# Altium PCB LayoutDesign.PcbDoc
Units mm, origin at the board's own origin, x right, y up, seen from the top; angles counter-clockwise.
Board outline 67.75 x 40.3 mm, 2 copper layers (Top Layer, Bottom Layer), stack 1.569 mm thick; 9 components, 16 nets, 95 pads, 20 vias.
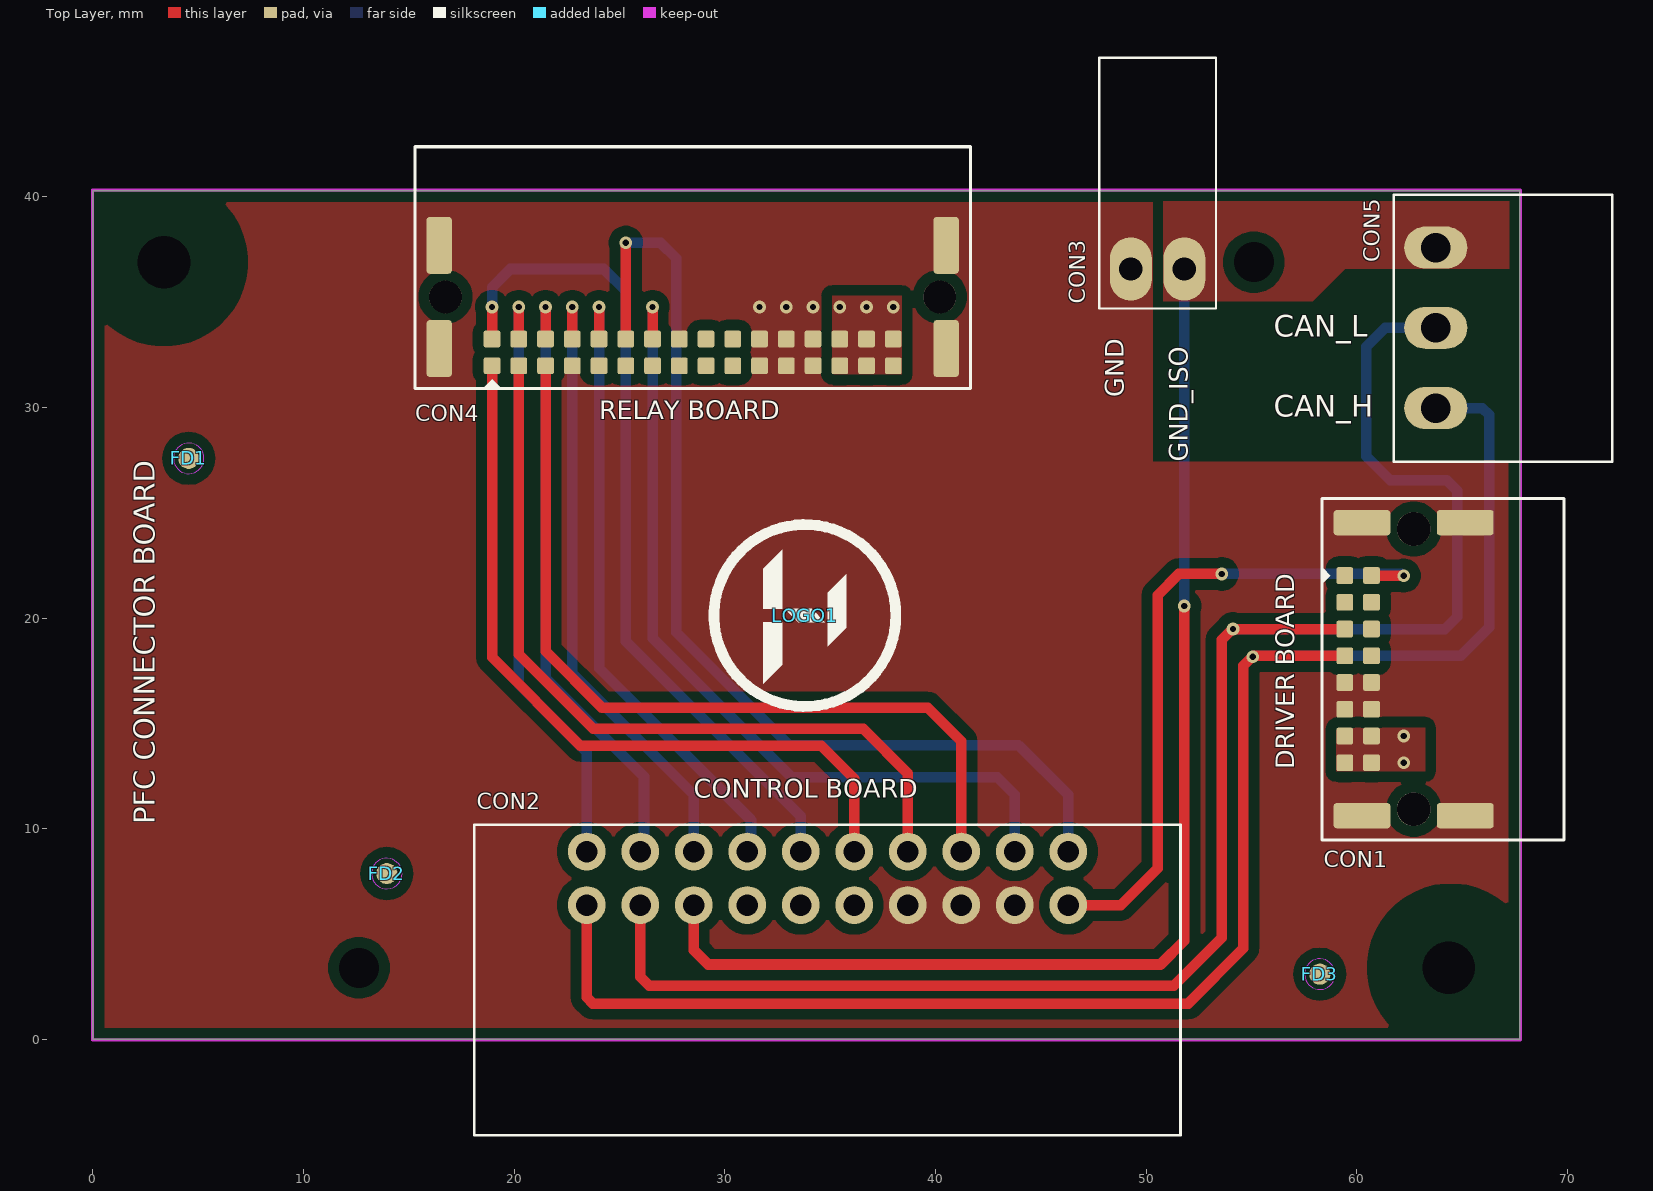
[diagram p0: Top Layer view]
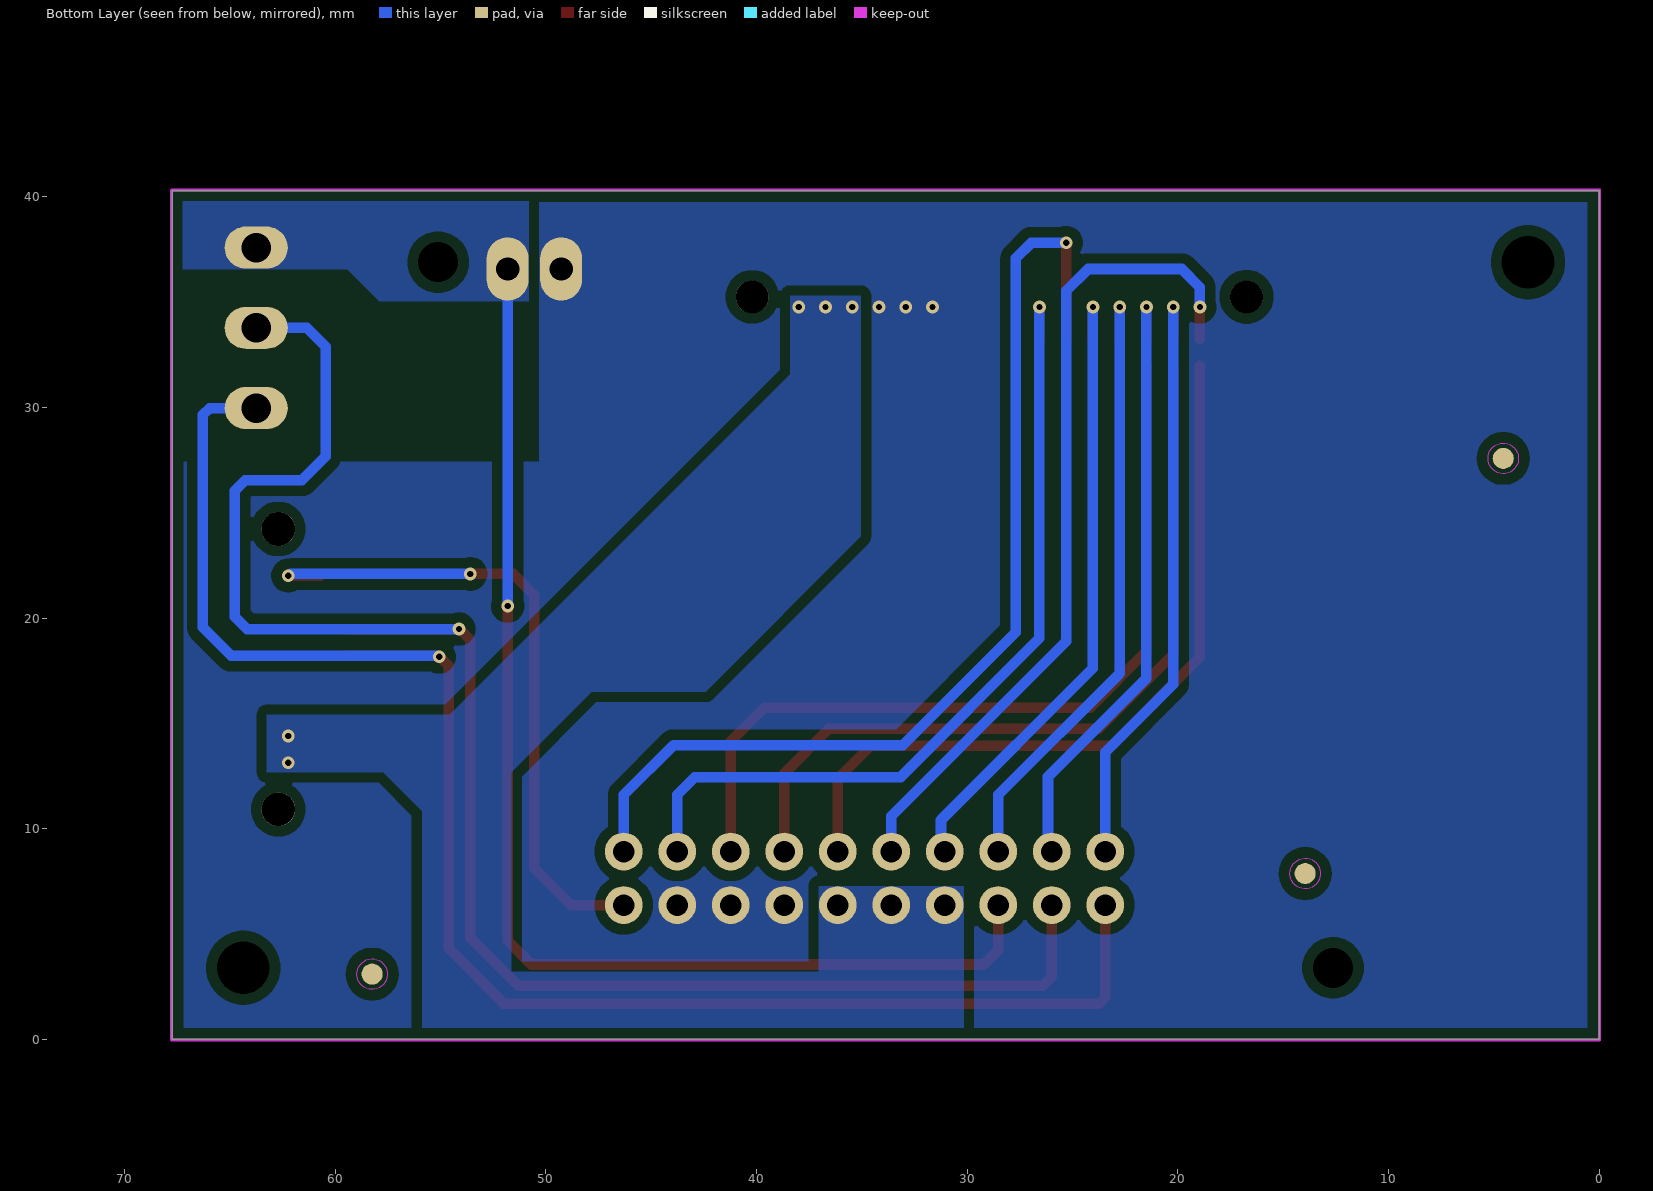
[diagram p1: Bottom Layer view, seen from below]
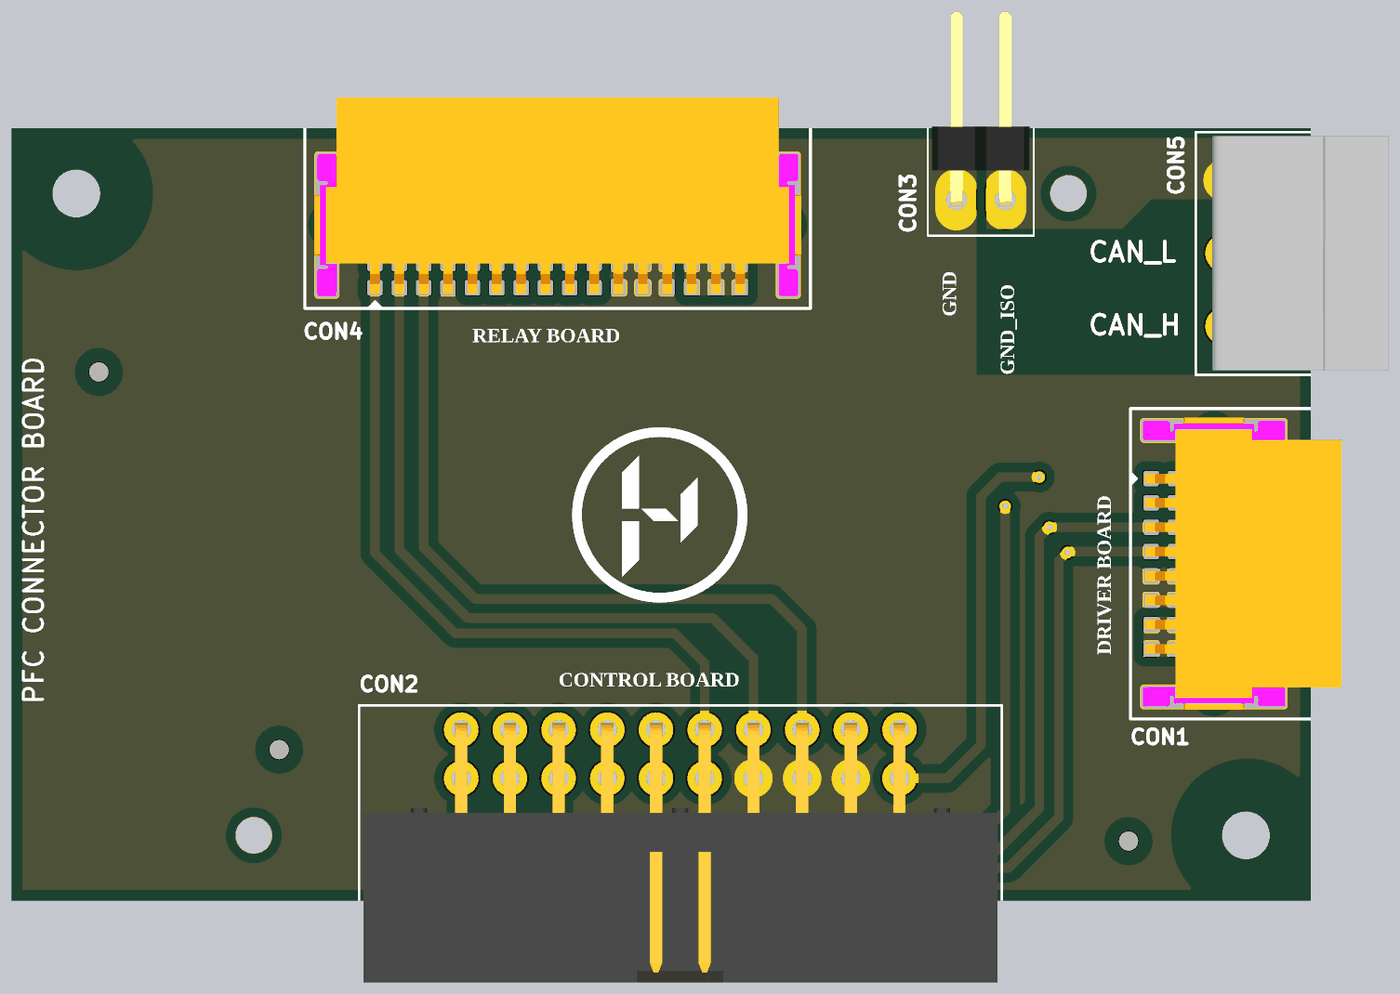
[diagram p2: 3D render of the assembled board from above, using the file's embedded part models]

## Layer stack, top to bottom
Top Solder: solder mask 0.0254, SM-001, Dk 4
Top Layer: signal copper 0.035
Dielectric 1: core 1.4986, Core-043, Dk 4.3
Bottom Layer: signal copper 0.035
Bottom Solder: solder mask 0.0254, SM-001, Dk 4

## Board outline
0,0 0,32.4 0,40.3 9.542,40.3 67.75,40.3 67.75,7.9 67.75,0 61.542,0

## Design rules (kind name [scope] priority, off if disabled: settings)
BoardOutlineClearance [All] p1: gap=0.5 ignorepadtopadclearanceinfootprint=FALSE
Clearance GND [InNet('GND') vs InNet('GND_ISO')] p1: gap=0.5 ignorepadtopadclearanceinfootprint=FALSE
Clearance 12V [InNet('+12V')] p2: gap=0.5 ignorepadtopadclearanceinfootprint=FALSE
Clearance [All] p3: gap=0.5 ignorepadtopadclearanceinfootprint=FALSE
PlaneClearance [All] p1: clearance=0.254
PolygonConnect [All] p1: connectstyle=Direct reliefconductorwidth=0.254 reliefentries=4 polygonreliefangle="90 Angle" airgapwidth=0.254
RoutingVias [All] p1: holewidth=0.711 width=1.27 viastyle="Through Hole" minholewidth=0.711 minwidth=1.27 maxholewidth=0.711 maxwidth=1.27
SolderMaskExpansion [All] p1: expansion=0.102 istentingtop=FALSE
Width [All] p1: maxlimit=1 minlimit=0.2 preferedwidth=0.254
29 further rules are at their usual default settings.

## Components (designator, comment, footprint, x,y, rotation, side; value= is the part's Value field where it differs from the comment)
CON1 "CON_16P_2R_A8-B8_2SH" CON_15150162601000_HARTING 62.293,17.577 r90 top locked
CON2 "CON_20POS_2R" male-thd-box-header-2x10-2.54mm-90D_AMTEK 34.874,7.645 r0 top
CON3 "CON_2POS_1R" male-thd-1x2-pin-header-2.54mm-90D 50.546,36.576 r180 top
CON4 "CON_32P_2R_A16-B16_2SH" CON_15150322601000_HARTING 28.473,34.84 r180 top
CON5 "CON_3POS_1R" CON_15EDGRC-3.81-03P-14-00AH 63.754,33.782 r90 top
FD1 "FIDUCIAL" FIDUCIAL_1mm 4.547,27.584 r0 top
FD2 "FIDUCIAL" FIDUCIAL_1mm 13.953,7.874 r0 top
FD3 "FIDUCIAL" FIDUCIAL_1mm 58.25,3.099 r0 top
LOGO1 "HCD_LOGO" HCD_LOGO_V1 33.802,20.125 r0 top locked

## Footprints (in the part's own frame and the unit in brackets; to place one, negate y for a bottom-side part, rotate by r counter-clockwise, add the part's x,y. Pads: shape width x height; smd on the part's side, far side on the other; paste and mask are expansions set on the pad)
CON_15EDGRC-3.81-03P-14-00AH [mm]
  oval 2x3 hole 1.4: 1(-3.81,0) 2(0,0) 3(3.81,0)
  silkscreen extent -6.35,-8.38 6.32,2, body extent -6.11,-8.06 6.11,1.14, height 7.29
CON_15150162601000_HARTING [mm]
  rrect25% 0.8x0.8 smd mask+0.05: A1(4.445,1.59) A2(3.175,1.59) A3(1.905,1.59) A4(0.635,1.59) A5(-0.635,1.59) A6(-1.905,1.59) A7(-3.175,1.59) A8(-4.445,1.59) B1(4.445,2.86) B2(3.175,2.86) B3(1.905,2.86) B4(0.635,2.86) B5(-0.635,2.86) B6(-1.905,2.86) B7(-3.175,2.86) B8(-4.445,2.86)
  rrect25% 1.2x2.7 smd mask+0.05: SH1(6.955,-2.86) SH1(6.955,2.04) SH2(-6.955,-2.86) SH2(-6.955,2.04)
  round 1.6 hole 1.6 unplated mask+0: ""(-6.655,-0.41) ""(6.655,-0.41)
  silkscreen extent -8.1,-7.54 8.1,3.94, body extent -7.62,-7.06 7.62,3.29, height 4.26
CON_15150322601000_HARTING [mm]
  rrect25% 0.8x0.8 smd mask+0.05: A1(9.525,1.59) A2(8.255,1.59) A3(6.985,1.59) A4(5.715,1.59) A5(4.445,1.59) A6(3.175,1.59) A7(1.905,1.59) A8(0.635,1.59) A9(-0.635,1.59) A10(-1.905,1.59) A11(-3.175,1.59) A12(-4.445,1.59) A13(-5.715,1.59) A14(-6.985,1.59) A15(-8.255,1.59) A16(-9.525,1.59) B1(9.525,2.86) B2(8.255,2.86) B3(6.985,2.86) B4(5.715,2.86) B5(4.445,2.86) B6(3.175,2.86) B7(1.905,2.86) B8(0.635,2.86) B9(-0.635,2.86) B10(-1.905,2.86) B11(-3.175,2.86) B12(-4.445,2.86) B13(-5.715,2.86) B14(-6.985,2.86) B15(-8.255,2.86) B16(-9.525,2.86)
  rrect25% 1.2x2.7 smd mask+0.05: SH1(12.035,-2.86) SH1(12.035,2.04) SH2(-12.035,-2.86) SH2(-12.035,2.04)
  round 1.55 hole 1.55 unplated mask+0: ""(-11.735,-0.41) ""(11.735,-0.41)
  silkscreen extent -13.18,-7.54 13.18,3.94, body extent -12.7,-7.06 12.7,3.29, height 4.27
FIDUCIAL_1mm [mm]
  round 1 smd mask+0.05: ""(0,0)
  round 1 smd far side mask+0.05: ""(0,0)
  Top Layer keep-out circle w0.05: c0,0 r0.725
  Bottom Layer keep-out circle w0.05: c0,0 r0.725
HCD_LOGO_V1 [mm]
  silkscreen extent -4.31,-4.32 4.32,4.32
male-thd-1x2-pin-header-2.54mm-90D [mm]
  oval 2x3 hole 1.1: 1(-1.27,0) 2(1.27,0)
  silkscreen extent -2.77,-10.03 2.77,1.88, body extent -2.54,-9.81 2.54,0.32, height 2.51
male-thd-box-header-2x10-2.54mm-90D_AMTEK [mm]
  round 1.8 hole 1.02: 1(-11.43,1.27) 2(-8.89,1.27) 3(-6.35,1.27) 4(-3.81,1.27) 5(-1.27,1.27) 6(1.27,1.27) 7(3.81,1.27) 8(6.35,1.27) 9(8.89,1.27) 10(11.43,1.27) 11(-11.43,-1.27) 12(-8.89,-1.27) 13(-6.35,-1.27) 14(-3.81,-1.27) 15(-1.27,-1.27) 16(1.27,-1.27) 17(3.81,-1.27) 18(6.35,-1.27) 19(8.89,-1.27) 20(11.43,-1.27)
  silkscreen extent -16.76,-12.19 16.76,2.54, body extent -16.53,-11.92 16.53,1.63, height 8.86

## Part data
CON1: library part CONN_MALE_BXHDR_16POS_2R_1.27MM_SMD_90D_15150162601000, "Connector Header Surface Mount, Right Angle 16 position 0.050\" (1.27mm)", Current=N/A, Manufacturer=HARTING, Manufacturer PN=15150162601000, Max Reflow Temp=260C, Temp# Operating="-55°C ~ 125°C", Component Type=Connector, Distributor=Digikey, Features="Contact Finish-Mating - Gold_Contact Finish-Post - Tin_Contact Material - Copper Alloy_Material Flammability Rating - UL94 V-0", Height=4.25, Lead Status="ROHS3 Compliant", Max Reflow Duration=10s, Mounting Type=SMD, MSL=1, Supplier URL=https://www.digikey.com/en/products/detail/harting/15150162601000/3854911?s=N4IgTCBcDaIIwFZEAY4DYxtcnIC6AvkA, Voltage=N/A, Identifier=CONN_MALE_BXHDR_16POS_2R_1.27MM_SMD_90D_15150162601000
CON2: library part CONN_MALE_BXHDR_20POS_2R_2.54MM_THD_90D_5BH1RDA88-20G05AU-00, "BOX HEADER 20PIN(2x10) 2.54mm THT R/A MALE BLACK", Current=3A, Manufacturer=AMTEK, Manufacturer PN=5BH1RDA88-20G05AU-00, Max Reflow Temp=260C, Temp# Operating="-45°C ~ 105°C", Voltage="1000V AC", Component Type="Box Header", Distributor=Özdisan, Features="Flat kablo konnektörü", Height=10.32mm, Lead Status="ROHS3 Compliant", Max Reflow Duration=10s, Mounting Type=THD, MSL=1, Supplier URL=https://www.ozdisan.com/konnektor-ve-baglanti-elemanlari/header-konnektorler/box-headerlar/5BH1RDA88-20G05AU-00/485576, Identifier=CONN_MALE_BXHDR_20POS_2R_2.54MM_THD_90D_5BH1RDA88-20G05AU-00
CON3: library part PINHDR_MALE_HEADER_2POS_1R_2.54mm_THD_90D, "PIN HEADER 2PIN(1x2) 2.54mm THT R/A 6X3X4.5MM", Manufacturer=AMTEK, Manufacturer PN=5PH1RUA25-102G0NNBL6X3X4, Max Reflow Temp=260C, Temp# Operating="-40°C ~ 105°C", Tolerance=N/A, Voltage="500V AC", Component Type="Pin Header", Distributor=Özdisan, Features="Pin Header", Lead Status="ROHS3 Compliant", Max Reflow Duration=10s, Mounting Type=THD, MSL=1, Supplier URL=https://ozdisan.com/konnektor-ve-baglanti-elemanlari/header-konnektorler/pin-headerlar/5PH1RUA25-102G0NNBL6X3X4/959033, Identifier=PINHDR_MALE_HEADER_2POS_1R_2.54mm_THD_90D
CON4: library part CONN_MALE_BXHDR_32POS_2R_1.27MM_SMD_90D_15150322601000, "Connector Header Surface Mount, Right Angle 32 position 0.050\" (1.27mm)", Current=N/A, Manufacturer=HARTING, Manufacturer PN=15150322601000, Max Reflow Temp=260C, Temp# Operating="-55°C ~ 125°C", Component Type=Connector, Distributor=Digikey, Features="Contact Finish-Mating - Gold_Contact Finish-Post - Tin_Contact Material - Copper Alloy_Material Flammability Rating - UL94 V-0", Height=4.25, Lead Status="ROHS3 Compliant", Max Reflow Duration=10s, Mounting Type=SMD, MSL=1, Supplier URL=https://www.digikey.com/en/products/detail/harting/15150322601000/3854914?s=N4IgTCBcDaIIwFZEAYDMYwDZl2XkAugL5A, Voltage=N/A, Identifier=CONN_MALE_BXHDR_32POS_2R_1.27MM_SMD_90D_15150322601000
CON5: library part KLEMENS_PLG-IN_MALE_3POS_1R_3.81mm_THD_90D_15EDGRC-3.81-03P-14-00AH, "TERM.BLK.3.81MM 3P 90C MALE GREEN CLOSED", Current=8A, Manufacturer=DEGSON, Manufacturer PN=15EDGRC-3.81-03P-14-00AH, Max Reflow Temp=260C, Temp# Operating="-40°C ~ 105°C", Temp# Storage=N/A, Voltage=300V, Component Type=Klemens, Distributor=Özdisan, Features="Geçmeli klemens", Height=9.2mm, Lead Status="ROHS3 Compliant", Max Reflow Duration=10s, Mounting Type=THD, MSL=1, Supplier URL=https://ozdisan.com/konnektor-ve-baglanti-elemanlari/klemensler/gecmeli-klemensler/15EDGRC-3-81-03P-14-00AH/701115, Identifier=KLEMENS_PLG-IN_MALE_3POS_1R_3.81mm_THD_90D_15EDGRC-3.81-03P-14-00AH
FD1 FD2 FD3: library part 1MM_FIDUCIAL, "Fiducial 1mm", Current=N/A, Package=FIDUCIAL_1mm, Component Type=Fiducial, ComponentLinkURL=N/A, Cost=N/A, Distributor=N/A, Features=N/A, Height=N/A, Lead Status=N/A, Manufacturer=N/A, Manufacturer PN=N/A, Max Reflow Duration=N/A, Max Reflow Temp=N/A, Mounting Type=SMD, MSL=N/A, Part Status=N/A, Temp# Operating=N/A, Temp# Storage1=N/A, Voltage=N/A, Identifier=1MM_FIDUCIAL
LOGO1: library part HCD_LOGO_V1, "Hamit Can Dinç LOGO", Component Type=LOGO, Identifier=HCD_LOGO_V1

## Free pads (board coordinates)
  rect 0x0 hole 1.9: 18(12.63,3.4) 18(55.12,36.9)
  round 0.2 hole 2.5 unplated: ""(3.37,36.9) ""(64.37,3.4)

## Via types
v1: diameter 0.6, hole 0.3, Top Layer to Bottom Layer, 20 vias

## Nets (pads, with @x,y where several pads share a name; then routed paths per layer and width w, separated by ;. In a path a pad name is that pad's centre, name@x,y a point inside that pad or via, vN(x,y) a via of type N, cw(c..) or ccw(c..) an arc to the next point about the centre after c; other vN are vias at no path point)
+12V: CON1.A7 CON1.A8 CON1.B7 CON1.B8 CON2.14 CON2.15 CON2.16 CON4.A14 CON4.A15 CON4.A16 CON4.B14 CON4.B15 CON4.B16
  other v1: 62.227,13.132 62.227,14.402 35.458,34.774 36.728,34.774 37.998,34.774
CAN_H: CON1.B4 CON2.11 CON5.1 | length 79.7
  Top Layer w0.5: CON2.11 23.444,1.995 23.737,1.702 51.994,1.702 54.61,4.318 54.61,17.731 55.04,18.161 v1(55.067,18.161) 55.094,18.161 55.145,18.212 CON1.B4
  Bottom Layer w0.5: v1@55.145,18.212 64.948,18.212 66.294,19.558 66.294,29.647 65.969,29.972 CON5.1
CAN_L: CON1.B3 CON2.12 CON5.2 | length 83.1
  Top Layer w0.5: CON2.12 25.984,2.972 26.416,2.54 51.308,2.54 53.594,4.826 53.594,18.975 54.1,19.482 v1(54.127,19.482) CON1.B3
  Bottom Layer w0.5: v1@54.114,19.482 v1(54.127,19.482) 64.186,19.482 64.77,20.066 64.77,26.053 64.276,26.547 61.591,26.547 60.452,27.686 60.452,32.884 61.35,33.782 CON5.2
FLY_EN: CON1.A1 CON2.20 | length 31.6
  Top Layer w0.254: CON1.A1 CON1.A1@60.709,22.015 ; v1@62.214,22.015 v1@62.221,22.009
  Top Layer w0.5: CON2.20 48.793,6.375 50.546,8.128 50.546,21.082 51.562,22.098 v1(53.594,22.098) ; CON1.A1@60.709,22.015 v1@62.214,22.015
  Bottom Layer w0.5: v1(53.594,22.098) 62.124,22.098 62.203,22.019 v1(62.23,22.019)
GND: CON1.A5 CON1.A6 CON1.B5 CON1.B6 CON1.SH1 CON1.SH2 CON2.17 CON2.18 CON2.19 CON3.2 CON4.A8 CON4.A11 CON4.A12 CON4.A13 CON4.B4 CON4.B11 CON4.B12 CON4.B13 CON4.SH1 CON4.SH2
  other v1: 31.648,34.774 32.918,34.774 34.188,34.774
GND_ISO: CON2.13 CON3.1 CON5.3 | length 58.1
  Top Layer w0.5: CON2.13 28.524,4.242 29.21,3.556 50.685,3.556 51.816,4.687 v1(51.816,20.574)
  Bottom Layer w0.5: v1(51.816,20.574) CON3.1
INRS1: CON2.10 CON4.A6 | length 49.5
  Top Layer w0.5: CON4.A6 v1(25.298,37.822)
  Bottom Layer w0.5: v1(25.298,37.822) 26.948,37.822 27.686,37.084 27.686,19.338 33.054,13.97 43.942,13.97 46.304,11.608 CON2.10
INRS2: CON2.9 CON4.A7 | length 40.2
  Top Layer w0.5: CON4.A7 v1(26.568,34.774)
  Bottom Layer w0.5: v1(26.568,34.774) 26.568,19.042 33.164,12.446 42.926,12.446 43.764,11.608 CON2.9
PHS_N_OFF: CON2.4 CON4.A5 | length 30.4
  Top Layer w0.5: CON4.A5 v1(24.028,34.774)
  Bottom Layer w0.5: v1(24.028,34.774) 24.028,17.628 31.242,10.414 31.242,9.093 CON2.4
PHS_N_ON: CON2.3 CON4.A4 | length 29.8
  Top Layer w0.5: CON4.A4 v1(22.758,34.774)
  Bottom Layer w0.5: v1(22.758,34.774) 22.758,17.374 28.524,11.608 CON2.3
PHS_R_OFF: CON2.7 CON4.B2 | length 38.2
  Top Layer w0.5: CON4.B2 20.218,18.28 23.753,14.745 36.563,14.745 38.684,12.624 CON2.7
PHS_R_ON: CON2.8 CON4.B3 | length 40.3
  Top Layer w0.5: CON4.B3 21.488,18.424 24.169,15.744 39.628,15.744 41.224,14.148 CON2.8
PHS_S_OFF: CON2.5 CON4.A1 | length 39.7
  Top Layer w0.5: CON4.A1 v1(18.948,34.774)
  Bottom Layer w0.5: v1(18.948,34.774) 18.948,35.712 19.812,36.576 24.258,36.576 25.298,35.536 25.298,18.898 33.604,10.592 CON2.5
PHS_S_ON: CON2.6 CON4.B1 | length 36.9
  Top Layer w0.5: CON4.B1 18.948,18.136 23.139,13.945 34.569,13.945 36.144,12.37 CON2.6
PHS_T_OFF: CON2.2 CON4.A3 | length 29.4
  Top Layer w0.5: CON4.A3 v1(21.488,34.774)
  Bottom Layer w0.5: v1(21.488,34.774) 21.488,17.133 26.162,12.46 26.162,9.093 CON2.2
PHS_T_ON: CON2.1 CON4.A2 | length 28.7
  Top Layer w0.5: CON4.A2 v1(20.218,34.774)
  Bottom Layer w0.5: v1(20.218,34.774) 20.218,16.866 23.444,13.64 CON2.1
pads on no net: CON1. CON1.A2 CON1.A3 CON1.A4 CON1.B1 CON1.B2 CON4. CON4.A9 CON4.A10 CON4.B5 CON4.B6 CON4.B7 CON4.B8 CON4.B9 CON4.B10 FD1. FD2. FD3.

## Polygon pours and split planes (outlines as drawn)
GND on Top Layer "GND_L01_P009" (solid, remove dead copper, pour order 9): 67.75,27.432 50.317,27.432 50.317,40.3 0,40.3 0,0 67.75,0
GND_ISO on Top Layer "GND_ISO_L01_P000" (solid, pour order 0): 67.75,36.592 59.452,36.592 57.912,35.052 50.827,35.052 50.827,40.3 67.75,40.3
+12V on Top Layer "NONET_L-01_P-001" (solid, pour order 7): 63.246,12.732 59.033,12.732 59.033,14.802 63.246,14.802
+12V on Top Layer "NONET_L-01_P-001" (solid, pour order 4): 35.058,33.25 35.052,33.256 35.052,35.306 38.398,35.306 38.398,31.58 35.058,31.58
GND on Top Layer "NONET_L-01_P-001" (solid, pour order 1): 31.248,33.25 31.242,33.256 31.242,35.306 34.588,35.306 34.588,31.58 31.248,31.58
GND on Bottom Layer "GND_L02_P008" (solid, remove dead copper, pour order 8): 67.75,27.432 50.317,27.432 50.317,40.3 0,40.3 0,0 67.75,0
GND_ISO on Bottom Layer "GND_ISO_L02_P006" (solid, pour order 6): 67.75,36.576 59.436,36.576 57.912,35.052 50.827,35.052 50.827,40.3 67.75,40.3
+12V on Bottom Layer "NONET_L-01_P-001" (solid, pour order 5): 35.052,35.306 38.398,35.306 38.398,31.58 54.928,15.05 52.101,12.223 47.814,16.51 42.418,16.51 35.052,23.876
+12V on Bottom Layer "NONET_L-01_P-001" (solid, pour order 3): 63.246,15.403 63.246,12.686 57.734,12.686 55.88,10.831 55.88,0.417 30.164,0.417 30.164,7.275 37.044,7.275 37.044,3.211 51.638,3.211 51.638,12.686 54.356,15.403

## Keep-outs
Keep-Out Layer:
  lines w0.1: -0.05,0 ccw(c0,0) 0,-0.05 ; -0.05,0 ccw(c0,0) 0,-0.05 ; -0.05,0 -0.05,32.4 -0.05,40.3 ; -0.05,40.3 cw(c0,40.3) 0,40.35 ; -0.05,40.3 cw(c0,40.3) 0,40.35 ; 0,-0.05 61.542,-0.05 67.75,-0.05 ; 0,40.35 9.542,40.35 67.75,40.35 ; 67.75,-0.05 ccw(c67.75,0) 67.8,0 ; 67.75,-0.05 ccw(c67.75,0) 67.8,0 ; 67.75,40.35 cw(c67.75,40.3) 67.8,40.3 ; 67.75,40.35 cw(c67.75,40.3) 67.8,40.3 ; 67.8,0 67.8,7.9 67.8,40.3 ; 0,0 61.542,0 67.75,0 67.75,7.9 67.75,40.3 9.542,40.3 0,40.3 0,32.4 0,0

## Other copper
Top Layer:
  pour cut-out: 64.47,-0.6 cw(c64.47,3.4) 60.47,3.4 cw(c64.47,3.4) 64.47,7.4 cw(c64.47,3.4) 68.47,3.4 cw(c64.47,3.4)
  pour cut-out: 3.37,32.9 cw(c3.37,36.9) -0.63,36.9 cw(c3.37,36.9) 3.37,40.9 cw(c3.37,36.9) 7.37,36.9 cw(c3.37,36.9)

## Silkscreen, mask and mechanical layers (free items; w line width, h text height)
Top Overlay:
  text "CAN_L" at 56.058,33.367 h1.02
  text "GND" at 49.256,30.481 h1.52 r90
  text "CAN_H" at 56.058,29.557 h1.02
  text "RELAY BOARD" at 24.028,29.135 h1.52
  text "GND_ISO" at 52.281,27.433 h1.52 r90
  text "DRIVER BOARD" at 57.333,12.827 h1.52 r90
  text "CONTROL BOARD" at 28.524,11.172 h1.52
  text "PFC CONNECTOR BOARD" at 2.936,10.211 h1 r90
Mechanical 1:
  lines w0.01: 0,32.4 0,40.3 9.542,40.3 ; 0,32.4 0,0 61.542,0 ; 0,32.4 9.542,32.4 9.542,40.3 ; 9.542,40.3 67.75,40.3 67.75,7.9 ; 61.542,0 67.75,0 67.75,7.9 ; 61.542,0 61.542,7.9 67.75,7.9